# EAGLE board Board (EAGLE 9.7.0)
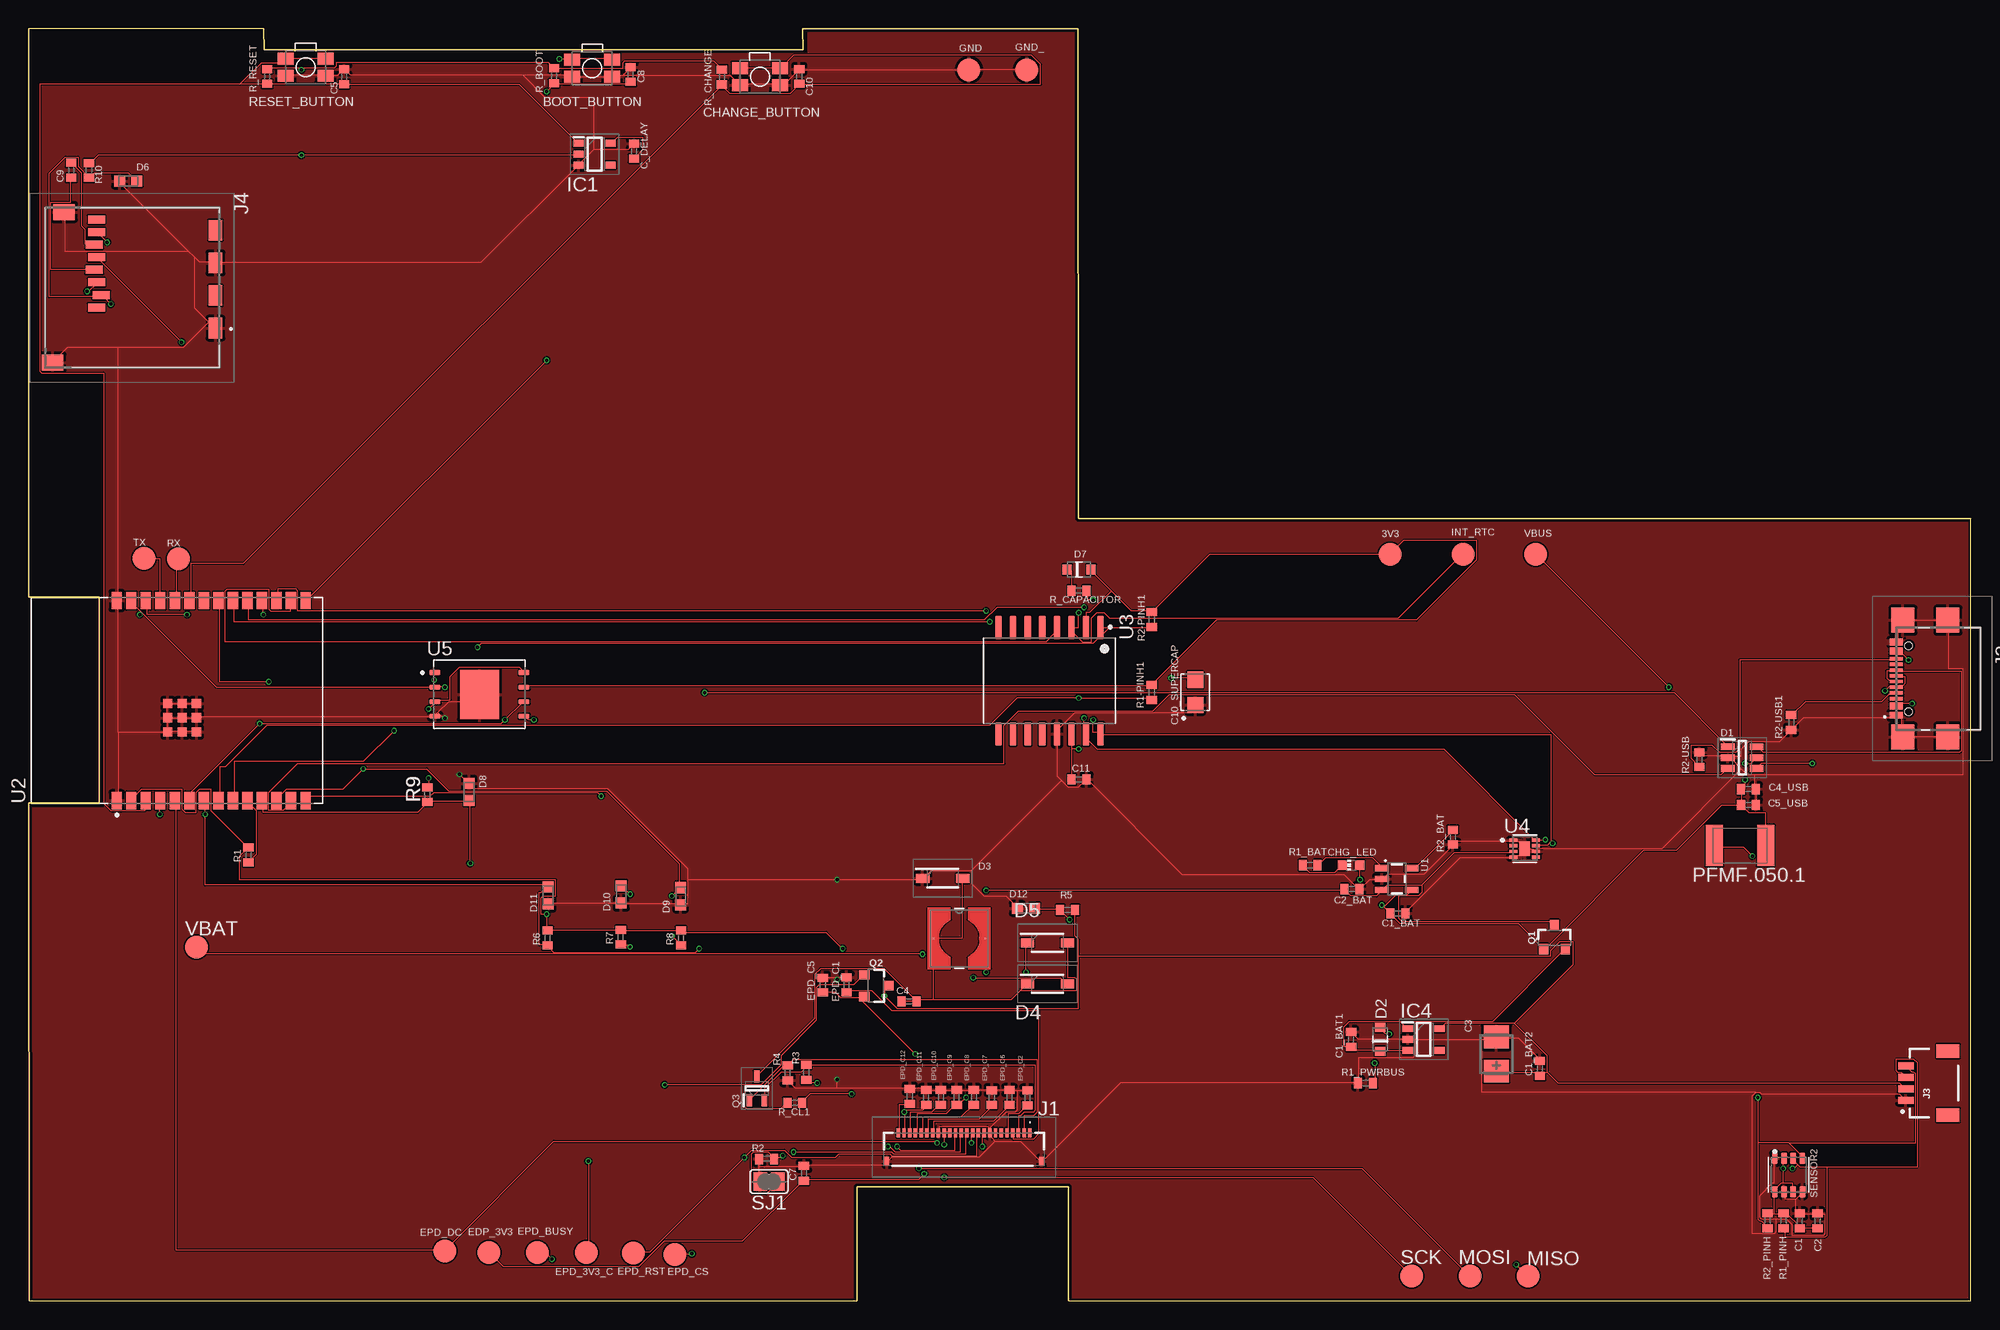
[diagram p0: board, top side]
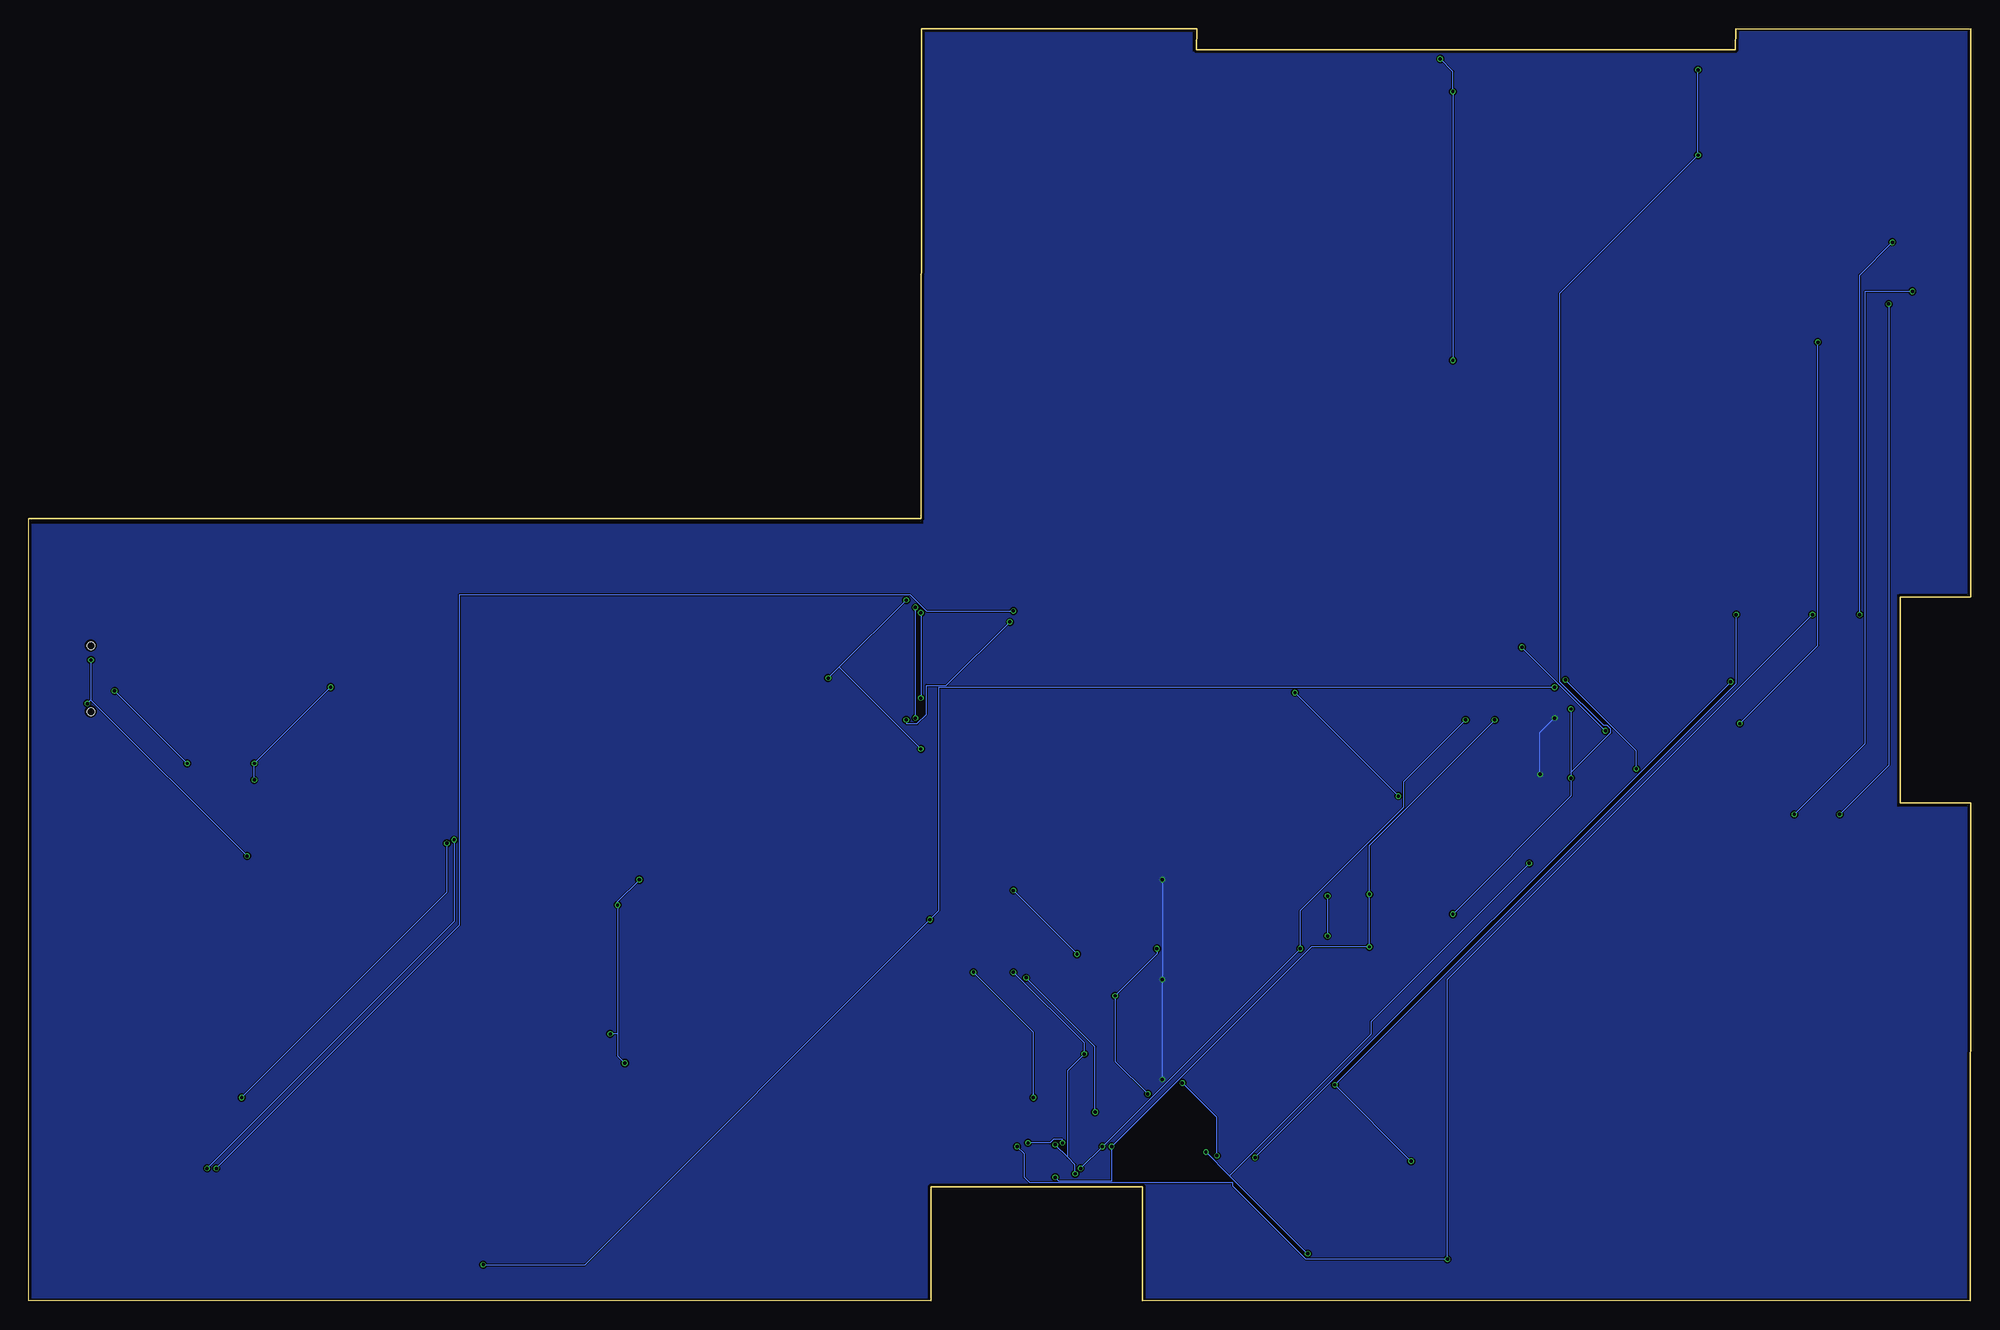
[diagram p1: board, bottom side, seen from below]

Size 169.79 x 111.24 mm. Coordinates in mm from the lower left corner, seen from the top.
Outline: 0.04,0 72.43,0 72.43,9.98 90.89,9.98 90.89,0 169.79,0 169.79,68.42 91.77,68.42 91.74,111.22 67.67,111.22 67.69,109.4 20.58,109.4 20.54,111.24 0,111.24 0,61.54 6.16,61.54 6.16,43.53 0.02,43.53 0.04,0
Copper layers (1*16): Top 0.035mm / dielectric 1.6mm / Bottom 0.035mm
Design rules "jlcpcb-2layers.edru *": minimum track width 0.003809375mm, minimum drill 0.3mm, track to track 5mil, track to pad 5mil, pad to pad 5mil, via to via 5mil, smd to smd 5mil, copper to edge 0.2mm, drill to drill 6mil, minimum pad ring 10mil, minimum via ring 3mil, stop-mask expansion 4mil, vias tented up to drill 0mil, thermal gap 10mil
Net classes: 1 NET: width 0.008 mm

## Footprints (pad centres in the part's own frame; a part is rotated, then mirrored left to right if it is on the bottom)
TP20R = smd 2 x 2: TP 0,0
MYBUTTON = smd 1.4 x 1.05: 1 1.75,0.75; 2 -1.75,0.75; 3 -1.75,-0.75; 4 1.75,-0.75
ESP32_WROVER_EAGLE-LTSPICE_C0402 = smd 0.7 x 0.9: 1 -0.65,0; 2 0.65,0
EAGLE-LTSPICE_C0402 = smd 0.7 x 0.9: 1 -0.65,0; 2 0.65,0
RCL_CT3528 = smd 2 x 2.2: + -1.5,0; - 1.5,0
CAPCP3225X100N = smd 1.4 x 1.4: 1 -1.1,0; 2 1.1,0
ADAFRUIT_CHIP-LED0603 = smd 0.8 x 0.8: A 0,-0.75; C 0,0.75
SOT95P280X145-6N = smd 1.2 x 0.6: 1 -1.25,0.95; 2 -1.25,0; 3 -1.25,-0.95; 4 1.25,-0.95; 5 1.25,0; 6 1.25,0.95
ESP32_WROVER_AVX---SD0805S020S1R0_AVX_SD0805S020S1R0_0 = smd 0.8 x 0.9: 1 -1.05,0; 2 1.05,0
SOD3716X135N = smd 1.15 x 0.8: 1 -1.75,0; 2 1.75,0
DIOC1608X36N = smd 0.97 x 0.94: 1 -0.75,0; 2 0.75,0
SOT95P280X125-5N = smd 0.9 x 0.6: 1 -1.4,0.95; 2 -1.4,0; 3 -1.4,-0.95; 4 1.4,-0.95; 5 1.4,0.95
SOT95P280X120-5N = smd 0.9 x 0.6: 1 -1.4,0.95; 2 -1.4,0; 3 -1.4,-0.95; 4 1.4,-0.95; 5 1.4,0.95
FH34SRJ24S05SH99 = smd 0.3 x 0.8: 1 5.75,1.45; 2 5.25,1.45; 3 4.75,1.45; 4 4.25,1.45; 5 3.75,1.45; 6 3.25,1.45; 7 2.75,1.45; 8 2.25,1.45; 9 1.75,1.45; 10 1.25,1.45; 11 0.75,1.45; 12 0.25,1.45; 13 -0.25,1.45; 14 -0.75,1.45; 15 -1.25,1.45; 16 -1.75,1.45; 17 -2.25,1.45; 18 -2.75,1.45; 19 -3.25,1.45; 20 -3.75,1.45; 21 -4.25,1.45; 22 -4.75,1.45; 23 -5.25,1.45; 24 -5.75,1.45 | smd 0.4 x 0.8: MP1 6.75,-1.05; MP2 -6.75,-1.05
SAMACSYS_PARTS_USB4110GFA = smd 0.3 x 1.15: A1 -3.35,3.678; A4 -2.55,3.678; A5 -1.25,3.678; A6 -0.25,3.678; A7 0.25,3.678; A8 1.25,3.678; A9 2.55,3.678; A12 3.35,3.678; B1 3.05,3.678; B4 2.25,3.678; B5 1.75,3.678; B6 0.75,3.678; B7 -0.75,3.678; B8 -1.75,3.678; B9 -2.25,3.678; B12 -3.05,3.678 | smd 2.18 x 2: MP1 -5.11,-0.827; MP2 5.11,-0.827; MP3 -5.11,3.103; MP4 5.11,3.103 | hole 0.65: -2.89,2.603; 2.89,2.603
JST04_1MM_RA = smd 0.6 x 1.35: 1 -1.5,0; 2 -0.5,0; 3 0.5,0; 4 1.5,0 | smd 1.2 x 2: NC1 2.8,-3.675; NC2 -2.8,-3.675
112ATAARR03ATTEND = smd 1.8 x 1.2: G1 10.6,10.4; G2 4.9,10.4; S1 7.75,10.4; S2 2.05,10.4 | smd 1.4 x 1.9: G3 13.6,-3.85; G4 0.45,-2.85 | smd 0.7 x 1.5: P1 8.8,0; P2 7.7,0.4; P3 6.6,0; P4 5.5,-0.2; P5 4.4,0; P6 3.3,-0.2; P7 2.2,0; P8 1.1,0
IND_4828-WE-TPC_WRE = smd 0.127 x 0.127: 1 -2.286,0; 2 2.286,0
ESP32C6_VARISTOR_CT/CN1812 = smd 1.5 x 3.6: 1 -2.25,0; 2 2.25,0
ESP32_WROVER_SPARKFUN-DISCRETESEMI_SOT23-3 = smd 0.8 x 0.9: 1 -0.95,-1; 2 0.95,-1; 3 0,1.1
SOT65P210X110-3N = smd 1.05 x 0.5: 1 -1.05,0.65; 2 -1.05,-0.65; 3 1.05,0
ESP32_WROVER_EAGLE-LTSPICE_R0402 = smd 0.7 x 0.9: 1 -0.65,0; 2 0.65,0
ESP32_WROVER_BME680_PSON80P300X300X100-8N = smd 1.016 x 0.5: 1 1.458,1.2; 2 1.458,0.4; 3 1.458,-0.4; 4 1.458,-1.2; 5 -1.458,-1.22; 6 -1.458,-0.4; 7 -1.458,0.4; 8 -1.458,1.2
SJ = smd 1.168 x 1.6: 1 -0.762,0; 2 0.762,0
ESP32_WROVER_SPARKFUN-IC-POWER_SOT23-5 = smd 0.55 x 1.2: 1 -0.95,-1.3; 2 0,-1.3; 3 0.95,-1.3; 4 0.95,1.3; 5 -0.95,1.3
XCVR_ESP32-C6-WROOM-1-N8 = smd 1.5 x 0.9: 1 -8.75,5.26; 2 -8.75,3.99; 3 -8.75,2.72; 4 -8.75,1.45; 5 -8.75,0.18; 6 -8.75,-1.09; 7 -8.75,-2.36; 8 -8.75,-3.63; 9 -8.75,-4.9; 10 -8.75,-6.17; 11 -8.75,-7.44; 12 -8.75,-8.71; 13 -8.75,-9.98; 14 -8.75,-11.25; 15 8.75,-11.25; 16 8.75,-9.98; 17 8.75,-8.71; 18 8.75,-7.44; 19 8.75,-6.17; 20 8.75,-4.9; 21 8.75,-3.63; 22 8.75,-2.36; 23 8.75,-1.09; 24 8.75,0.18; 25 8.75,1.45; 26 8.75,2.72; 27 8.75,3.99; 28 8.75,5.26 | smd 0.8 x 0.8: 29_1 -2.755,0.79; 29_2 -1.505,0.79; 29_3 -0.255,0.79; 29_4 -2.755,-0.46; 29_5 -1.505,-0.46; 29_6 -0.255,-0.46; 29_7 -2.755,-1.71; 29_8 -1.505,-1.71; 29_9 -0.255,-1.71
SOIC127P1032X265-16N = smd 2.05 x 0.59: 1 -4.655,4.445; 2 -4.655,3.175; 3 -4.655,1.905; 4 -4.655,0.635; 5 -4.655,-0.635; 6 -4.655,-1.905; 7 -4.655,-3.175; 8 -4.655,-4.445; 9 4.655,-4.445; 10 4.655,-3.175; 11 4.655,-1.905; 12 4.655,-0.635; 13 4.655,0.635; 14 4.655,1.905; 15 4.655,3.175; 16 4.655,4.445
SON50P200X200X80-9N = smd 0.76 x 0.27: 1 -0.985,0.75; 2 -0.985,0.25; 3 -0.985,-0.25; 4 -0.985,-0.75; 5 0.985,-0.75; 6 0.985,-0.25; 7 0.985,0.25; 8 0.985,0.75 | smd 0.9 x 1.3: 9 0,0
SON127P600X800X80-9N = smd 0.94 x 0.44: 1 -3.895,1.905; 2 -3.895,0.635; 3 -3.895,-0.635; 4 -3.895,-1.905; 5 3.895,-1.905; 6 3.895,-0.635; 7 3.895,0.635; 8 3.895,1.905 | smd 3.4 x 4.3: 9 0,0

## Placement (x,y rotation side)
3V3  TPTP20R  [TP20R]  119.04,65.27 0 top
BOOT_BUTTON  BUTTON_CUSYOMV1  [MYBUTTON]  49.27,107.77 180 top
C1  100nF  [ESP32_WROVER_EAGLE-LTSPICE_C0402]  154.84,7.01 90 top
C1_BAT  4.7uF  [EAGLE-LTSPICE_C0402]  119.71,33.88 0 top
C1_BAT1  4.7uF  [EAGLE-LTSPICE_C0402]  115.61,22.86 90 top
C1_BAT2  4.7uF  [EAGLE-LTSPICE_C0402]  132.12,20.32 90 top
C2  100nF  [ESP32_WROVER_EAGLE-LTSPICE_C0402]  156.39,6.99 90 top
C2_BAT  4.7uF  [EAGLE-LTSPICE_C0402]  115.69,36.01 0 top
C3  100uF TANT  [RCL_CT3528]  128.31,21.59 90 top
C4  4.7uF/25V  [EAGLE-LTSPICE_C0402]  76.96,26.2 0 top
C4_USB  100nF  [EAGLE-LTSPICE_C0402]  150.35,44.75 0 top
C5  1uF  [EAGLE-LTSPICE_C0402]  27.59,107.04 90 top
C5_USB  4.7uF  [EAGLE-LTSPICE_C0402]  150.35,43.36 0 top
C7  10uF  [EAGLE-LTSPICE_C0402]  67.78,11.16 90 top
C8  100nF  [EAGLE-LTSPICE_C0402]  52.63,107.22 90 top
C9  [EAGLE-LTSPICE_C0402]  3.73,98.85 90 top
C10  100nF  [EAGLE-LTSPICE_C0402]  67.37,107.06 90 top
C10_SUPERCAP  CPH3225A  [CAPCP3225X100N]  101.99,53.21 90 top
C11  100nF  [EAGLE-LTSPICE_C0402]  91.83,45.59 0 top
C_DELAY  100nF  [EAGLE-LTSPICE_C0402]  52.92,100.52 90 top
CHANGE_BUTTON  BUTTON_CUSYOMV1  [MYBUTTON]  63.94,107.03 180 top
CHG_LED  [ADAFRUIT_CHIP-LED0603]  115.61,38.1 90 top
D1  USBLC6-2SC6Y  [SOT95P280X145-6N]  149.8,47.5 0 top
D2  ESP32_WROVER_AVX---SD0805S020S1R0_AVX_SD0805S020S1R0_0_0AVX_SD0805S020S1R0_0_0  [ESP32_WROVER_AVX---SD0805S020S1R0_AVX_SD0805S020S1R0_0]  118.15,22.86 90 top
D3  MBR0530  [SOD3716X135N]  79.92,36.95 0 top
D4  MBR0530  [SOD3716X135N]  89.06,27.71 0 top
D5  MBR0530  [SOD3716X135N]  89.07,31.31 0 top
D6  PGB1010603MR  [DIOC1608X36N]  8.71,97.9 0 top
D7  ESP32_WROVER_AVX---SD0805S020S1R0_AVX_SD0805S020S1R0_0_0AVX_SD0805S020S1R0_0_0  [ESP32_WROVER_AVX---SD0805S020S1R0_AVX_SD0805S020S1R0_0]  91.83,63.95 0 top
D8  PGB1010603MR  [DIOC1608X36N]  38.51,44.49 270 top
D9  PGB1010603MR  [DIOC1608X36N]  57,35.38 90 top
D10  PGB1010603MR  [DIOC1608X36N]  51.81,35.54 90 top
D11  PGB1010603MR  [DIOC1608X36N]  45.42,35.46 90 top
D12  PGB1010603MR  [DIOC1608X36N]  87.19,34.33 0 top
EDP_3V3  TPTP20R  [TP20R]  40.25,4.23 0 top
EPD_3V3_C  TPTP20R  [TP20R]  48.78,4.23 0 top
EPD_BUSY  TPTP20R  [TP20R]  44.47,4.23 0 top
EPD_C1  1uF/50V  [EAGLE-LTSPICE_C0402]  71.51,27.62 90 top
EPD_C2  1uF/50V  [EAGLE-LTSPICE_C0402]  87.32,17.76 90 top
EPD_C5  0.1uF/50V  [EAGLE-LTSPICE_C0402]  69.42,27.61 90 top
EPD_C6  1uF/50V  [EAGLE-LTSPICE_C0402]  85.75,17.79 90 top
EPD_C7  1uF/50V  [EAGLE-LTSPICE_C0402]  84.2,17.78 90 top
EPD_C8  1uF/50V  [EAGLE-LTSPICE_C0402]  82.63,17.8 90 top
EPD_C9  1uF/50V  [EAGLE-LTSPICE_C0402]  81.13,17.8 90 top
EPD_C10  1uF/50V  [EAGLE-LTSPICE_C0402]  79.75,17.81 90 top
EPD_C11  1uF/50V  [EAGLE-LTSPICE_C0402]  78.46,17.79 90 top
EPD_C12  1uF/50V  [EAGLE-LTSPICE_C0402]  77.03,17.9 90 top
EPD_CS  TPTP20R  [TP20R]  56.51,4.07 0 top
EPD_DC  TPTP20R  [TP20R]  36.38,4.38 0 top
EPD_RST  TPTP20R  [TP20R]  52.85,4.18 0 top
GND  TPTP20R  [TP20R]  82.19,107.64 0 top
GND_  TPTP20R  [TP20R]  87.27,107.64 0 top
IC1  BD5229G-TR  [SOT95P280X125-5N]  49.48,100.26 0 top
IC4  XC6220A331MR-G  [SOT95P280X120-5N]  121.96,22.86 0 top
INT_RTC  TPTP20R  [TP20R]  125.39,65.27 0 top
J1  FH34SRJ-24S-0.5SH_99_  [FH34SRJ24S05SH99]  81.78,13.25 0 top
J2  SAMACSYS_PARTS_USB4110-GF-A  [SAMACSYS_PARTS_USB4110GFA]  166.95,54.41 90 top
J3  QWIIC_RIGHT_ANGLE  [JST04_1MM_RA]  164.1,19.05 90 top
J4  112A-TAAR-R03_ATTEND  [112ATAARR03ATTEND]  5.94,95.65 270 top
L1  68uH  [IND_4828-WE-TPC_WRE]  81.35,31.69 0 top
MISO  TPTP20R  [TP20R]  131.08,2.18 0 top
MOSI  TPTP20R  [TP20R]  126,2.18 0 top
PFMF.050.1  ESP32C6_VARISTORCN1812  [ESP32C6_VARISTOR_CT/CN1812]  149.61,39.82 0 top
Q1  20V/4.2A/52mΩ/1.4W  [ESP32_WROVER_SPARKFUN-DISCRETESEMI_SOT23-3]  133.39,31.75 0 top
Q2  20V/4.2A/52mΩ/1.4W  [ESP32_WROVER_SPARKFUN-DISCRETESEMI_SOT23-3]  74.06,27.56 270 top
Q3  SI1308EDL-T1-GE3  [SOT65P210X110-3N]  63.66,18.58 90 top
R1  10K  [ESP32_WROVER_EAGLE-LTSPICE_R0402]  19.23,38.98 90 top
R1-PINH1  10k  [ESP32_WROVER_EAGLE-LTSPICE_R0402]  98.18,53.21 90 top
R1_BAT  200  [ESP32_WROVER_EAGLE-LTSPICE_R0402]  112.04,38.1 0 top
R1_PINH  [ESP32_WROVER_EAGLE-LTSPICE_R0402]  153.41,7.02 90 top
R1_PWRBUS  100k  [ESP32_WROVER_EAGLE-LTSPICE_R0402]  116.88,19.05 0 top
R2  2.2  [ESP32_WROVER_EAGLE-LTSPICE_R0402]  64.51,12.41 0 top
R2-PINH1  10k  [ESP32_WROVER_EAGLE-LTSPICE_R0402]  98.18,59.56 90 top
R2-USB  5k1  [ESP32_WROVER_EAGLE-LTSPICE_R0402]  146.05,47.32 90 top
R2-USB1  5k1  [ESP32_WROVER_EAGLE-LTSPICE_R0402]  154.08,50.57 90 top
R2_BAT  2k  [ESP32_WROVER_EAGLE-LTSPICE_R0402]  124.51,40.55 90 top
R2_PINH  [ESP32_WROVER_EAGLE-LTSPICE_R0402]  152.02,7.02 90 top
R3  0.47  [ESP32_WROVER_EAGLE-LTSPICE_R0402]  67.99,19.98 90 top
R4  10K  [ESP32_WROVER_EAGLE-LTSPICE_R0402]  66.36,19.95 90 top
R5  10k  [ESP32_WROVER_EAGLE-LTSPICE_R0402]  90.83,34.19 0 top
R6  10k  [ESP32_WROVER_EAGLE-LTSPICE_R0402]  45.38,31.73 90 top
R7  10k  [ESP32_WROVER_EAGLE-LTSPICE_R0402]  51.77,31.81 90 top
R8  10k  [ESP32_WROVER_EAGLE-LTSPICE_R0402]  57.04,31.73 90 top
R9  10k  [ESP32_WROVER_EAGLE-LTSPICE_R0402]  34.86,44.26 90 top
R10  10k  [ESP32_WROVER_EAGLE-LTSPICE_R0402]  5.28,98.84 90 top
R_BOOT  10k  [ESP32_WROVER_EAGLE-LTSPICE_R0402]  45.94,107.11 90 top
R_CAPACITOR  15  [ESP32_WROVER_EAGLE-LTSPICE_R0402]  91.83,62.1 0 top
R_CHANGE  10k  [ESP32_WROVER_EAGLE-LTSPICE_R0402]  60.61,107.01 90 top
R_CL1  10K  [ESP32_WROVER_EAGLE-LTSPICE_R0402]  66.98,17.32 0 top
R_RESET  10k  [ESP32_WROVER_EAGLE-LTSPICE_R0402]  20.86,107.06 90 top
RESET_BUTTON  BUTTON_CUSYOMV1  [MYBUTTON]  24.22,107.85 180 top
RX  TPTP20R  [TP20R]  13.08,64.87 0 top
SCK  TPTP20R  [TP20R]  120.92,2.18 0 top
SENSOR2  BME688  [ESP32_WROVER_BME680_PSON80P300X300X100-8N]  153.86,11.01 90 top
SJ1  [SJ]  64.73,10.44 0 top
TX  TPTP20R  [TP20R]  10.1,64.93 0 top
U1  ESP32_WROVER_SPARKFUN-IC-POWER_MCP73831  [ESP32_WROVER_SPARKFUN-IC-POWER_SOT23-5]  119.61,36.89 270 top
U2  ESP32-C6-WROOM-1-N8  [XCVR_ESP32-C6-WROOM-1-N8]  12.96,52.49 90 top
U3  DS3231SN#  [SOIC127P1032X265-16N]  89.25,54.22 270 top
U4  MAX17048G+T10  [SON50P200X200X80-9N]  130.78,39.54 0 top
U5  W25Q512JVEIQ  [SON127P600X800X80-9N]  39.42,53.03 0 top
VBAT  TPTP20R  [TP20R]  14.67,30.91 0 top
VBUS  TPTP20R  [TP20R]  131.74,65.27 0 top

## Library data of the parts
3V3 BOOT_BUTTON CHANGE_BUTTON CHG_LED EDP_3V3 EPD_3V3_C EPD_BUSY EPD_CS EPD_DC EPD_RST GND GND_ INT_RTC MISO MOSI PFMF.050.1 RESET_BUTTON RX SCK SJ1 TX VBAT VBUS = DeskAssistant v19 v1
C1 C1_BAT C1_BAT1 C1_BAT2 C2 C2_BAT C4 C4_USB C5 C5_USB C7-C11 C_DELAY EPD_C1 EPD_C2 EPD_C5-EPD_C12 = DeskAssistant v19 v1; SPICEMODEL: NONE; SPICEPREFIX: C
C3 = DeskAssistant v19 v1; SPICEPREFIX: C
C10_SUPERCAP = DeskAssistant v19 v1; AVAILABILITY: Not in stock; CHECK_PRICES: https://www.snapeda.com/parts/CPH3225A/Seiko+Instruments/view-part/?ref=eda; DESCRIPTION: 11 mF (EDLC) Supercapacitor 3.3 V 1210 (3225 Metric) - -; MF: Seiko Instruments; MP: CPH3225A; PACKAGE: 1210 Seiko; PRICE: None; PURCHASE-URL: https://www.snapeda.com/api/url_track_click_mouser/?unipart_id=562593&manufacturer=Seiko Instruments&part_name=CPH3225A&search_term=None; SNAPEDA_LINK: https://www.snapeda.com/parts/CPH3225A/Seiko+Instruments/view-part/?ref=snap
D1 = DeskAssistant v19 v1; AVAILABILITY: In Stock; CHECK_PRICES: https://www.snapeda.com/parts/USBLC6-2SC6Y/STMicroelectronics/view-part/?ref=eda; DESCRIPTION: 17V Clamp 5A (8/20µs) Ipp Tvs Diode Surface Mount SOT-23-6; MF: STMicroelectronics; MP: USBLC6-2SC6Y; PACKAGE: SOT-23-6 STMicroelectronics; PRICE: None; SNAPEDA_LINK: https://www.snapeda.com/parts/USBLC6-2SC6Y/STMicroelectronics/view-part/?ref=snap
D2 D7 = DeskAssistant v19 v1; CENTROID_NOT_SPECIFIED: No; DATASHEET: http://datasheets.avx.com/schottky.pdf; DIGIKEY_DESCRIPTION: DIODE SCHOTTKY 20V 1A 0805; DIGIKEY_PART_NUMBER: 478-7800-1-ND; LEAD_FREE: yes; MF: AVX; MOUSER_PART_NUMBER: 581-SD0805S020S1R0; PACKAGE: 0805 (2012 metric); PREFIX: D; ROHS: yes; TEMPERATURE_RANGE_HIGH: +125°C; TEMPERATURE_RANGE_LOW: -55°C
D3-D5 = DeskAssistant v19 v1; AVAILABILITY: In Stock; CHECK_PRICES: https://www.snapeda.com/parts/MBR0530/Onsemi/view-part/?ref=eda; DESCRIPTION: Diode Schottky 30 V 500mA Surface Mount SOD-123; MF: ON Semiconductor; MP: MBR0530; PACKAGE: SOD-123-2 ON Semiconductor; PRICE: None; PURCHASE-URL: https://www.snapeda.com/api/url_track_click_mouser/?unipart_id=179458&manufacturer=ON Semiconductor&part_name=MBR0530&search_term=None; SNAPEDA_LINK: https://www.snapeda.com/parts/MBR0530/Onsemi/view-part/?ref=snap
D6 D8-D12 = DeskAssistant v19 v1; AVAILABILITY: In Stock; CHECK_PRICES: https://www.snapeda.com/parts/PGB1010603MR/Littelfuse/view-part/?ref=eda; DESCRIPTION: 150V (Typ) Clamp - Ipp Tvs Diode Surface Mount 0603 (1608 Metric); MF: Littelfuse Inc.; MP: PGB1010603MR; PACKAGE: 0603 Littelfuse Inc.; PRICE: None; PURCHASE-URL: https://www.snapeda.com/api/url_track_click_mouser/?unipart_id=5659453&manufacturer=Littelfuse Inc.&part_name=PGB1010603MR&search_term=None; SNAPEDA_LINK: https://www.snapeda.com/parts/PGB1010603MR/Littelfuse/view-part/?ref=snap
IC1 = DeskAssistant v19 v1; DESCRIPTION: Voltage Detector with Adjustable Delay Time: CMOS processes are utilized to develop high precision, low current consumption CMOS reset ICs that allow arbitrary setting of the delay time. The extensive lineup includes both Nch Open Drain and CMOS output types in a wide range of detection voltages (from 2.3V to 6.0V, in 0.1V steps), enabling selection of the ideal solution based on customer requirements. In addition, the entire series is of course both lead-free and RoHS-compliant.; HEIGHT: 1.25mm; MANUFACTURER_NAME: ROHM Semiconductor; MANUFACTURER_PART_NUMBER: BD5229G-TR; MOUSER_PART_NUMBER: 755-BD5229G-TR; MOUSER_PRICE-STOCK: https://www.mouser.co.uk/ProductDetail/ROHM-Semiconductor/BD5229G-TR?qs=4kLU8WoGk0vvnhrrYwdszw%3D%3D
IC4 = DeskAssistant v19 v1; DESCRIPTION: LDO Voltage Regulators; HEIGHT: 1.2mm; MANUFACTURER_NAME: Torex; MANUFACTURER_PART_NUMBER: XC6220A331MR-G; MOUSER_PART_NUMBER: 865-XC6220A331MR-G; MOUSER_PRICE-STOCK: https://www.mouser.co.uk/ProductDetail/Torex-Semiconductor/XC6220A331MR-G?qs=AsjdqWjXhJ8ZSWznL1J0gg%3D%3D
J1 = DeskAssistant v19 v1; DESCRIPTION: 24 Position FFC, FPC Connector Contacts, Top and Bottom 0.020" (0.50mm) Surface Mount, Right Angle; HEIGHT: 1.1mm; MANUFACTURER_NAME: Hirose; MANUFACTURER_PART_NUMBER: FH34SRJ-24S-0.5SH(99); MOUSER_PART_NUMBER: 798-FH34SRJ24S05SH99; MOUSER_PRICE-STOCK: https://www.mouser.co.uk/ProductDetail/Hirose-Connector/FH34SRJ-24S-0.5SH99?qs=vcbW%252B4%252BSTIpKBl5ap9J8Fw%3D%3D
J2 = DeskAssistant v19 v1; DESCRIPTION: CONN USB 2.0 TYPE-C R/A SMT; HEIGHT: 3.26mm; MANUFACTURER_NAME: GCT (GLOBAL CONNECTOR TECHNOLOGY); MANUFACTURER_PART_NUMBER: USB4110-GF-A; MOUSER_PART_NUMBER: 640-USB4110-GF-A; MOUSER_PRICE-STOCK: https://www.mouser.co.uk/ProductDetail/GCT/USB4110-GF-A?qs=KUoIvG%2F9IlYiZvIXQjyJeA%3D%3D
J3 = DeskAssistant v19 v1; PROD_ID: CONN-13694
J4 = DeskAssistant v19 v1; DESCRIPTION: Micro SD Card Socket, Push-Push Type, Top Mount, SMT, H=1.83mm, 10u; HEIGHT: 1.9mm; MANUFACTURER_NAME: ATTEND; MANUFACTURER_PART_NUMBER: 112A-TAAR-R03 ATTEND
L1 = DeskAssistant v19 v1; COPYRIGHT: Copyright (C) 2024 Ultra Librarian. All rights reserved.; MANUFACTURER_PART_NUMBER: 744043680; MFR_NAME: Wurth Electronics
Q1 Q2 = DeskAssistant v19 v1; PROD_ID: TRAN-14388
Q3 = DeskAssistant v19 v1; AVAILABILITY: In Stock; CHECK_PRICES: https://www.snapeda.com/parts/SI1308EDL-T1-GE3/Vishay+Siliconix/view-part/?ref=eda; DESCRIPTION: Si1308EDL-T1-GE3 N-channel MOSFET Transistor, 1.5 A, 30 V, 3-Pin SC-70 | Siliconix / Vishay SI1308EDL-T1-GE3; MF: Vishay Siliconix; MP: SI1308EDL-T1-GE3; PACKAGE: SOT-323 Vishay Semiconductor; PRICE: None; PURCHASE-URL: https://www.snapeda.com/api/url_track_click_mouser/?unipart_id=274603&manufacturer=Vishay Siliconix&part_name=SI1308EDL-T1-GE3&search_term=None; SNAPEDA_LINK: https://www.snapeda.com/parts/SI1308EDL-T1-GE3/Vishay+Siliconix/view-part/?ref=snap
R1 R1-PINH1 R1_BAT R1_PINH R1_PWRBUS R2 R2-PINH1 R2-USB R2-USB1 R2_BAT R2_PINH R3-R10 R_BOOT R_CAPACITOR R_CHANGE R_CL1 R_RESET = DeskAssistant v19 v1; SPICEMODEL: NONE; SPICEPREFIX: R
SENSOR2 = DeskAssistant v19 v1; AVAILABILITY: Unavailable; DESCRIPTION: Integrated Environmental Unit; MF: Bosch Sensortec; MP: BME680; PACKAGE: LGA-8 Bosch Tools; PRICE: None
U1 = DeskAssistant v19 v1; PROD_ID: IC-09995
U2 = DeskAssistant v19 v1; AVAILABILITY: In Stock; CHECK_PRICES: https://www.snapeda.com/parts/ESP32-C6-WROOM-1-N8/Espressif+Systems/view-part/?ref=eda; DESCRIPTION: Multiprotocol Modules ESP32-C6 module, Wi-Fi 6 in 2.4 GHz band, Bluetooth 5, Zigbee 3.0 and Thread. ESP34-WROOM Compatible - ENGINEERING SAMPLE; MF: Espressif Systems; MP: ESP32-C6-WROOM-1-N8; PACKAGE: None; PRICE: None; SNAPEDA_LINK: https://www.snapeda.com/parts/ESP32-C6-WROOM-1-N8/Espressif+Systems/view-part/?ref=snap
U3 = DeskAssistant v19 v1; AVAILABILITY: In Stock; CHECK_PRICES: https://www.snapeda.com/parts/DS3231SN%23/Analog+Devices/view-part/?ref=eda; DESCRIPTION: Extremely Accurate I²C-Integrated RTC/TCXO/Crystal; MF: Analog Devices; MP: DS3231SN#; PACKAGE: SOIC-16 Maxim; PRICE: None; PURCHASE-URL: https://www.snapeda.com/api/url_track_click_mouser/?unipart_id=99048&manufacturer=Analog Devices&part_name=DS3231SN#&search_term=None; SNAPEDA_LINK: https://www.snapeda.com/parts/DS3231SN%23/Analog+Devices/view-part/?ref=snap
U4 = DeskAssistant v19 v1; AVAILABILITY: In Stock; CHECK_PRICES: https://www.snapeda.com/parts/MAX17048G+T10/Analog+Devices/view-part/?ref=eda; DESCRIPTION: 3µA 1-Cell/2-Cell Fuel Gauge with ModelGauge; MF: Analog Devices; MP: MAX17048G+T10; PACKAGE: TDFN-8 Maxim; PRICE: None; PURCHASE-URL: https://www.snapeda.com/api/url_track_click_mouser/?unipart_id=329239&manufacturer=Analog Devices&part_name=MAX17048G+T10&search_term=None; SNAPEDA_LINK: https://www.snapeda.com/parts/MAX17048G+T10/Analog+Devices/view-part/?ref=snap
U5 = DeskAssistant v19 v1; AVAILABILITY: In Stock; CHECK_PRICES: https://www.snapeda.com/parts/W25Q512JVEIQ/Winbond+Electronics/view-part/?ref=eda; DESCRIPTION: FLASH - NOR Memory IC 512Mb (64M x 8) SPI - Quad I/O 133 MHz 8-WSON (8x6); MF: Winbond Electronics; MP: W25Q512JVEIQ; PACKAGE: Package; PRICE: None; SNAPEDA_LINK: https://www.snapeda.com/parts/W25Q512JVEIQ/Winbond+Electronics/view-part/?ref=snap

## Nets
3V3 [NET]: 3V3.TP C1_BAT2.1 C3.+ D7.2 IC1.2 IC4.5 J3.2 Q2.3 R1-PINH1.2 R1.2 R2-PINH1.2 R5.2 R6.2 R7.2 R8.2 R9.2 R10.2 R_BOOT.2 R_CHANGE.2 R_CL1.2 R_RESET.2 U2.2 U3.2 U5.3 U5.7 U5.8
32KHZ [NET]: R2-PINH1.1 U2.9 U3.1
DN: D1.4 J2.A7 J2.B7
DP: D1.6 J2.A6 J2.B6
EPD_3V3 [NET]: C7.1 EDP_3V3.TP EPD_C5.1 J1.15 J1.16 L1.2 Q2.2
EPD_3V3_C [NET]: EPD_3V3_C.TP Q2.1 R_CL1.1 U2.18
EPD_BUSY: EPD_BUSY.TP J1.9 U2.26
EPD_CS: D8.2 EPD_CS.TP J1.12 R9.1 U2.11
EPD_DC: EPD_DC.TP J1.11 U2.5
EPD_RST: EPD_RST.TP J1.10 U2.21
FLASH_CS: D9.2 R8.1 U2.12 U5.1
GDR: J1.2 Q3.1 R4.2
GND: BOOT_BUTTON.1 BOOT_BUTTON.2 C1.2 C1_BAT1.2 C1_BAT2.2 C1_BAT.2 C2.2 C2_BAT.2 C3.- C4_USB.2 C5.2 C5_USB.2 C7.2 C8.2 C10.2 C10_SUPERCAP.1 C11.2 C_DELAY.2 CHANGE_BUTTON.1 CHANGE_BUTTON.2 D1.2 D3.1 D6.1 D8.1 D9.1 D10.1 D11.1 D12.1 EPD_C1.2 EPD_C2.2 EPD_C5.2 EPD_C6.2 EPD_C7.2 EPD_C8.2 EPD_C9.2 EPD_C10.2 EPD_C11.2 EPD_C12.2 GND.TP GND_.TP IC1.3 IC4.2 J1.8 J1.17 J1.MP1 J1.MP2 J2.A1 J2.A12 J2.B1 J2.B12 J2.MP1 J2.MP2 J2.MP3 J2.MP4 J3.1 J4.G1 J4.G2 J4.G3 J4.G4 R1_PWRBUS.1 R2-USB1.1 R2-USB.2 R2.1 R2_BAT.1 R4.1 RESET_BUTTON.1 RESET_BUTTON.2 SENSOR2.1 SENSOR2.5 SENSOR2.7 SJ1.1 U1.2 U2.1 U2.28 U2.29_1 U2.29_2 U2.29_3 U2.29_4 U2.29_5 U2.29_6 U2.29_7 U2.29_8 U2.29_9 U3.13 U4.1 U4.4 U4.6 U4.9 U5.4 U5.9
GPIO8: R1.1 U2.10
I2C_PW [NET]: C1.1 C2.1 R1_PINH.2 R2_PINH.2 SENSOR2.2 SENSOR2.6 SENSOR2.8 U2.17
INT_RTC: INT_RTC.TP R1-PINH1.1 U2.8 U3.3
IO/BOOT: BOOT_BUTTON.3 BOOT_BUTTON.4 C8.1 R_BOOT.1 U2.15
IO/CHANGE: C10.1 CHANGE_BUTTON.3 CHANGE_BUTTON.4 R_CHANGE.1 U2.23
MISO: D12.2 J4.P7 MISO.TP R5.1 U2.27 U5.2
MOSI: D11.2 J1.14 J4.P3 MOSI.TP R6.1 U2.7 U5.5
N$1: C9.1 J4.P4
N$2: J2.B5 R2-USB.1
N$3: J2.A5 R2-USB1.2
N$4: C1_BAT1.1 D2.1 IC4.1 IC4.3 Q1.2
N$6: R1_BAT.2 U1.1
N$7: CHG_LED.C R1_BAT.1
N$9: R2_BAT.2 U1.5
N$10: EPD_C1.1 J1.4
N$11: EPD_C2.1 J1.5
N$12: EPD_C6.1 J1.18
N$13: EPD_C7.1 J1.19
N$14: EPD_C8.1 J1.20
N$15: EPD_C10.1 J1.22
N$16: EPD_C12.1 J1.24
N$17: C_DELAY.1 IC1.5
N$18: D7.1 R_CAPACITOR.1
N$19: C9.2 J4.P6
PREVGH: D5.1 EPD_C9.1 J1.21
PREVGL: D4.2 EPD_C11.1 J1.23
RESE: J1.3 Q3.2 R3.2
RESE': R2.2 R3.1 SJ1.2
RESET: C5.1 IC1.1 R_RESET.1 RESET_BUTTON.3 RESET_BUTTON.4 U2.3
RTC_RST: U2.16 U3.4
RX: RX.TP U2.24
SCK: D10.2 J1.13 J4.P5 R7.1 SCK.TP U2.6 U5.6
SCL: J3.4 R2_PINH.1 SENSOR2.4 U2.20 U3.16 U4.7
SDA: J3.3 R1_PINH.1 SENSOR2.3 U2.19 U3.15 U4.8
SRC: C4.1 C4.2 D3.2 D4.1 D5.2 L1.1 Q3.3
SS_SD: D6.2 J4.P2 R10.1 U2.4
TX: TX.TP U2.25
USB_D+: D1.1 U2.14
USB_D-: D1.3 U2.13
VBAT [NET]: C2_BAT.1 Q1.3 U1.3 U4.2 U4.3 VBAT.TP
VBUS [NET]: C1_BAT.1 C4_USB.1 C5_USB.1 CHG_LED.A D1.5 D2.2 PFMF.050.1.2 Q1.1 R1_PWRBUS.2 U1.4 VBUS.TP
VRTC [NET]: C10_SUPERCAP.2 C11.1 R_CAPACITOR.2 U3.14
VUSB [NET]: J2.A4 J2.A9 J2.B4 J2.B9 PFMF.050.1.1

## Tracks (layer width: path | path; a pad name or v marks a point on that pad's centre or on a via)
3V3  (via drill 0.3)
  Top 0.008: 23.85,107.79 26.71,107.79 26.87,107.95 26.87,108.27 45.44,108.27 45.92,107.79 R_BOOT.2 46.08,107.79 51.95,107.79 51.95,108.27 52.11,108.43 59.89,108.43 60.52,107.79 R_CHANGE.2 | 23.85,107.79 20.99,107.79 R_RESET.2 | R10.2 5.44,99.54 6.07,100.17 v23.85,100.17 47.98,100.17 IC1.2 | v23.85,107.63 23.85,107.79 | 131.8,20 132.12,19.68 C1_BAT2.1 131.8,20 | 131.8,20 128.31,20 C3.+ | 129.9,24.29 123.86,24.29 123.39,23.81 IC4.5 | 129.9,24.29 132.75,21.43 132.75,20 | 131.8,20 132.75,20 | 132.75,20 133.71,19.05 163.55,19.05 164.03,18.57 J3.2 | 94.65,62.07 96.4,60.33 98.15,60.33 R2-PINH1.2 98.3,60.33 103.23,65.25 118.94,65.25 3V3.TP 119.1,65.41 120.21,66.52 126.56,66.52 126.56,64.77 121.32,59.53 103.86,59.53 98.3,53.98 R1-PINH1.2 98.15,53.82 43.38,53.82 | 94.65,62.07 92.91,63.82 D7.2 | 94.65,62.07 92.75,60.17 92.43,60.17 92.43,58.9 U3.2 | v71.95,18.1 68.3,18.1 67.67,17.46 R_CL1.2 | Q2.3 75.13,27.46 74.81,27.46 v74.81,26.67 75.92,25.56 91.8,25.56 91.8,30.16 | 91.8,30.16 91.8,31.59 91.48,31.91 91.48,34.13 R5.2 | U2.2 8.93,43.81 9.88,44.77 13.37,44.77 13.37,43.02 13.69,42.7 14.64,42.7 14.64,44.45 14.96,44.77 15.91,44.77 15.91,42.86 19.09,39.69 R1.2 19.09,39.53 18.45,38.89 18.45,36.83 46.08,36.83 46.08,35.4 44.96,35.4 44.81,35.24 44.81,33.81 v45.28,33.81 45.28,32.38 R6.2 45.44,32.38 51.63,32.38 R7.2 51.79,32.38 57.03,32.38 R8.2 57.19,32.23 69.73,32.23 v71.16,30.8 | 43.38,53.82 43.38,54.93 U5.8 43.22,55.09 42.9,55.4 37.66,55.4 36.87,54.61 36.87,52.55 35.6,52.55 U5.3 35.6,52.39 v34.96,51.75 | v34.96,45.72 34.96,44.93 R9.2 | 43.38,53.82 U5.7 | 129.9,24.29 134.98,29.37 134.98,31.43 133.86,31.43 133.07,30.64 133.07,30.16 91.8,30.16
  Bottom 0.008: v23.85,107.63 v23.85,100.17 35.92,88.11 35.92,54.13 32.11,50.32 31.79,50.32 31.47,50.01 31.47,49.69 34.96,46.2 | v71.95,18.1 74.81,20.95 v74.81,26.67 71.16,30.32 v71.16,30.8 | v34.96,51.75 34.96,46.2 | 34.96,46.2 v34.96,45.72 34.96,44.13 v45.28,33.81
32KHZ  (via drill 0.3)
  Top 0.008: 94.49,58.9 93.7,58.9 U3.1 | 94.49,58.9 98.15,58.9 R2-PINH1.1 | v31.95,49.85 29.25,47.15 17.98,47.15 17.98,43.81 U2.9 | v39.25,57.15 39.57,57.47 93.07,57.47 94.49,58.9
  Bottom 0.008: v39.25,57.15 v31.95,49.85
DN  (via drill 0.3)
  Top 0.004: J2.A7 163.39,54.61 164.03,54.61 164.03,53.98 163.87,53.82 163.55,53.82 163.39,53.66 J2.B7 163.23,53.66 162.6,53.66 v162.28,53.34 | v155.93,46.99 151.49,46.99 151.17,46.67 D1.4
  Bottom 0.004: v162.28,53.34 v155.93,46.99
DP
  Top 0.004: J2.A6 163.23,54.29 162.6,54.29 162.44,54.45 162.44,55.09 163.23,55.09 J2.B6 163.39,55.09 168.95,55.09 168.95,48.1 168.79,47.94 151.64,47.94 151.17,48.42 D1.6
EPD_3V3  (via drill 0.3)
  Top 0.008: 72.75,26.35 72.9,26.51 Q2.2 72.75,26.35 | J1.15 80.52,14.76 80.05,14.76 J1.16 80.05,14.61 v80.05,13.65 | EDP_3V3.TP 40.36,4.13 41.47,3.02 53.38,3.02 55.6,5.24 62.43,5.24 67.67,10.48 C7.1 67.82,10.64 77.83,10.64 v78.3,11.11 | v77.51,21.59 72.75,26.35 | v83.7,28.73 83.7,31.75 L1.2 | 72.75,26.35 72.61,26.49 71.01,26.49 70.53,26.96 EPD_C5.1
  Bottom 0.008: 78.94,12.54 78.3,11.91 v78.3,11.11 | 78.94,12.54 v80.05,13.65 | 78.94,12.54 78.94,20.16 v77.51,21.59 77.51,22.54 v83.7,28.73
EPD_3V3_C  (via drill 0.3)
  Top 0.008: 62.59,18.89 62.59,16.99 62.74,16.83 65.76,16.83 66.24,17.3 R_CL1.1 | 62.59,18.89 64.01,18.89 65.76,20.64 65.76,21.43 68.84,24.51 68.84,27.37 69.1,27.62 72.11,27.62 72.9,28.42 Q2.1 | v20.52,60.01 20.52,61.12 U2.18 | 62.59,18.89 v55.6,18.89 | v48.93,12.22 48.93,4.29 EPD_3V3_C.TP
  Bottom 0.008: v20.52,60.01 20.52,53.98 v55.6,18.89 v48.93,12.22
EPD_BUSY  (via drill 0.3)
  Top 0.004: v83.38,13.49 83.38,14.61 J1.9 | v45.76,3.65 45.28,4.13 44.49,4.13 EPD_BUSY.TP | v13.85,60.01 10.36,60.01 10.36,61.12 U2.26
  Bottom 0.004: v83.38,13.49 82.75,12.86 82.75,10.79 82.27,10.32 64.49,10.32 64.49,10 58.14,3.65 v45.76,3.65 45.76,28.1 v13.85,60.01
EPD_CS  (via drill 0.3)
  Top 0.004: U2.11 20.52,43.66 20.52,42.7 34.01,42.7 34.8,43.5 R9.1 34.96,43.66 38.46,43.66 D8.2 38.61,43.66 v38.61,38.26 | v66.87,13.02 75.44,13.02 75.6,12.86 81.95,12.86 81.95,14.61 J1.12 | v57.98,4.13 56.55,4.13 EPD_CS.TP
  Bottom 0.004: v57.98,4.13 64.81,10.95 | 64.81,10.95 v66.87,13.02 | v38.61,38.26 52.43,24.45 52.43,23.34 64.81,10.95
EPD_DC  (via drill 0.3)
  Top 0.004: v82.43,13.81 82.43,14.61 J1.11 | v79.41,13.81 79.25,13.97 45.92,13.97 36.39,4.45 EPD_DC.TP 36.23,4.45 12.9,4.45 12.9,43.66 U2.5
  Bottom 0.004: v82.43,13.81 80.52,13.81 80.21,14.13 79.41,14.13 v79.41,13.81
EPD_RST  (via drill 0.3)
  Top 0.004: J1.10 82.91,14.61 82.91,12.7 75.44,12.7 75.29,12.86 70.84,12.86 70.52,12.54 66.71,12.54 66.08,13.18 63.22,13.18 v62.59,12.54 54.33,4.29 52.9,4.29 EPD_RST.TP | v20.99,54.13 16.71,54.13 16.71,61.12 U2.21
  Bottom 0.004: v62.59,12.54 v20.99,54.13
FLASH_CS  (via drill 0.3)
  Top 0.004: v56.24,31.91 57.03,31.11 R8.1 | v56.24,35.4 56.87,36.04 D9.2 56.87,36.2 56.87,38.26 50.52,44.61 36.71,44.61 34.8,46.51 v29.25,46.51 27.5,44.77 22.58,44.77 21.63,43.81 U2.12 | v35.44,54.29 35.44,54.93 U5.1
  Bottom 0.004: v56.24,35.4 v56.24,31.91 | v35.44,54.29 29.25,48.1 v29.25,46.51
GDR
  Top 0.004: J1.2 87.03,14.76 87.03,16.19 87.83,16.19 88.14,16.51 88.14,21.11 66.87,21.11 66.4,20.64 R4.2 66.24,20.48 65.92,20.48 63.06,17.62 Q3.1
GND  (via drill 0.3)
  Top 0.004: GND_.TP 87.19,107.63 82.27,107.63 GND.TP 82.11,107.63 67.51,107.63 C10.2 67.35,107.63 66.08,106.36 65.76,106.36 CHANGE_BUTTON.2 65.6,106.36 62.27,106.36 CHANGE_BUTTON.1 62.11,106.36 61.32,107.16 51.95,107.16 | 49.41,100.65 48.14,99.38 IC1.3 47.98,99.22 39.57,90.81 16.39,90.81 J4.G2 16.23,90.81 14.96,90.81 14.48,91.28 | 49.41,100.65 52.43,100.65 52.9,101.12 C_DELAY.2 | RESET_BUTTON.1 22.58,107.16 25.91,107.16 RESET_BUTTON.2 26.07,107.16 27.03,107.16 27.5,107.63 C5.2 27.66,107.63 28.14,107.16 43.22,107.16 | 51.95,107.16 52.58,107.79 C8.2 | 51.95,107.16 51.16,107.16 BOOT_BUTTON.2 51,107 47.66,107 BOOT_BUTTON.1 47.5,107.16 43.22,107.16 | 49.41,100.65 49.41,105.25 45.12,105.25 43.22,107.16 | 14.48,91.28 14.01,91.76 | 14.01,91.76 7.98,97.79 D6.1 | 15.75,85.57 14.48,86.84 14.48,91.28 | 15.75,85.57 16.23,85.09 J4.G1 15.75,85.57 | 7.82,83.34 13.53,83.34 15.75,85.57 | 7.82,83.34 3.37,83.34 2.1,82.07 J4.G3 | 14.01,91.76 3.21,91.76 3.21,95.09 J4.G4 | 35.76,51.44 36.71,52.39 38.77,52.39 U5.9 | 35.76,51.44 35.6,51.28 U5.4 35.44,51.12 14.8,51.12 U2.29_8 14.64,50.96 13.53,50.96 U2.29_5 13.37,50.96 12.26,50.96 U2.29_2 | U2.29_1 12.1,49.85 12.1,50.96 U2.29_2 | U2.29_1 12.26,49.85 13.37,49.85 U2.29_4 13.53,49.85 14.64,49.85 U2.29_7 | U2.29_2 12.1,51.12 12.1,52.23 U2.29_3 12.26,52.23 13.37,52.23 U2.29_6 13.53,52.23 14.64,52.23 U2.29_9 | 7.82,49.69 7.82,43.81 U2.1 | 7.82,49.69 12.1,49.69 U2.29_1 | 7.82,49.69 7.82,61.12 U2.28 7.82,61.28 7.82,83.34 | 63.86,11.75 63.86,10.48 SJ1.1 | 63.86,11.75 63.86,12.38 R2.1 | 63.86,11.75 67.67,11.75 C7.2 67.82,11.91 74.81,11.91 74.97,12.06 J1.MP2 75.13,12.22 75.44,12.54 83.06,12.54 84.49,13.97
  Top 0.004: 84.02,15.08 83.86,15.24 79.57,15.24 79.57,14.76 J1.17 | 84.02,15.08 84.02,14.76 J1.8 | 84.49,13.97 86.72,13.97 88.46,12.22 J1.MP1 88.62,12.22 95.45,19.05 R1_PWRBUS.1 116.24,19.05 116.24,21.27 121.01,21.27 121.16,21.43 121.16,22.86 | 84.49,13.97 84.18,14.29 84.18,14.61 J1.8 | 86.4,18.41 85.76,18.41 EPD_C6.2 85.6,18.41 84.33,18.41 EPD_C7.2 84.18,18.41 82.75,18.41 EPD_C8.2 82.59,18.41 81.16,18.41 EPD_C9.2 81,18.41 79.89,18.41 EPD_C10.2 79.73,18.41 78.62,18.41 EPD_C11.2 78.46,18.57 77.19,18.57 EPD_C12.2 77.03,18.57 70.68,18.57 | 86.4,18.41 87.19,18.41 EPD_C2.2 | 70.68,28.26 71.48,28.26 EPD_C1.2 | 70.68,28.26 69.54,28.26 EPD_C5.2 | 70.68,18.57 67.03,18.57 66.4,19.21 R4.1 | v70.68,28.1 70.68,28.26 | 70.68,18.57 v70.68,19.37 | 84.02,15.08 85.45,16.51 86.24,16.51 86.4,16.67 86.4,18.41 | 84.02,15.08 J1.8 | 128.31,23.02 130.21,23.02 132.12,21.11 C1_BAT2.2 | C1_BAT1.2 115.61,23.5 116.24,22.86 IC4.2 121.16,22.86 | 128.31,23.02 128.15,22.86 127.04,22.86 | 121.16,22.86 127.04,22.86 | 128.31,23.02 C3.- | 154.5,8.89 153.55,8.89 153.55,9.53 SENSOR2.7 | 154.5,8.89 155.14,9.53 SENSOR2.5 | 152.76,7.14 153.71,7.14 154.18,6.67 154.18,5.71 156.88,5.71 157.04,5.87 157.04,7.62 156.41,7.62 C2.2 156.25,7.62 154.98,7.62 C1.2 154.82,7.78 154.5,7.78 154.5,8.89 | 152.76,7.14 151.49,7.14 151.33,7.3 151.33,9.21 152.44,10.32 152.6,10.32 152.6,12.38 SENSOR2.1 | 151.01,18.26 151.33,18.26 151.49,18.1 163.55,18.1 164.03,17.62 J3.1 | 151.01,18.26 150.69,17.94 150.69,5.87 152.6,5.87 152.76,6.03 152.76,7.14 | 127.04,22.86 127.04,18.26 151.01,18.26 | 130.85,39.53 130.21,38.89 129.9,38.89 U4.4 129.74,38.73 125.13,38.73 120.37,33.97 C1_BAT.2
  Top 0.004: 130.85,39.53 131.48,39.53 131.64,39.37 U4.6 131.8,39.37 131.96,39.53 142.75,39.53 149.74,46.51 | 130.85,39.53 U4.9 130.69,39.69 130.21,40.16 129.9,40.16 U4.1 129.74,40.16 124.82,40.16 124.66,40.01 R2_BAT.1 124.5,39.85 121.96,37.31 118.78,37.31 118.47,36.99 U1.2 118.31,36.83 117.2,36.83 116.4,36.04 C2_BAT.2 116.24,36.04 114.97,37.31 100.84,37.31 92.59,45.56 C11.2 92.43,45.56 91.8,44.93 90.84,44.93 90.37,45.4 | J2.A1 163.23,50.96 155.14,50.96 154.18,50.01 R2-USB1.1 154.03,49.85 153.07,48.9 150.37,48.9 149.74,48.26 149.74,47.62 148.63,47.62 D1.2 | J2.B12 163.23,51.28 163.23,51.12 J2.A1 | J2.A1 163.39,50.96 163.71,50.96 163.71,49.37 J2.MP3 163.87,49.37 167.68,49.37 J2.MP1 | J2.B1 163.23,57.47 163.23,57.63 J2.A12 163.39,57.78 163.39,59.37 163.71,59.37 J2.MP4 163.87,59.53 167.68,59.53 J2.MP2 167.84,59.37 167.84,55.24 169.11,55.24 169.11,46.04 150.85,46.04 | C5_USB.2 151.01,43.5 151.01,44.61 C4_USB.2 150.85,44.77 150.85,46.04 | R2-USB.2 146.09,47.94 146.41,47.62 148.47,47.62 D1.2 | 150.85,46.04 150.22,46.04 149.74,46.51 | 149.74,46.51 148.79,47.47 148.63,47.47 D1.2 | D11.1 45.44,34.77 51.79,34.77 D10.1 51.95,34.77 56.87,34.77 D9.1 57.03,34.77 57.66,34.77 57.66,36.83 | 57.66,36.83 57.66,37.78 50.68,44.77 38.93,44.77 38.61,45.09 D8.1 38.46,45.24 v37.66,46.04 | 82.43,37.62 82.43,36.51 83.54,35.4 85.45,35.4 86.4,34.45 D12.1 | 82.43,37.62 78.94,37.62 78.3,36.99 D3.1 78.14,36.83 v70.68,36.83 57.66,36.83 | 90.37,45.4 89.89,45.88 89.89,49.53 U3.13 89.73,49.69 91.48,51.44 101.32,51.44 101.96,52.07 C10_SUPERCAP.1 | 82.43,37.62 90.21,45.4 90.37,45.4
  Top 0.004: 35.76,51.44 36.23,50.96 v36.39,50.96
  Bottom 0.004: v70.68,19.37 v70.68,28.1 v70.68,36.83 | v36.39,50.96 37.66,49.69 v37.66,46.04
  pour Top: 6.6,61.68 6.6,43.12 6.6,43.12 0.2,43.12 0.2,0.15 72.4,0.15 72.4,10.02 72.41,10.02 91.08,10.02 91.09,10.02 91.09,0.27 169.64,0.27 169.64,68.26 91.63,68.26 91.62,68.26 91.62,111.02 68.1,111.02 68.1,109.05 68.09,109.05 20.39,109.05 20.38,109.05 20.38,111.05 0.13,111.05 0.13,61.73 6.44,61.73 6.44,61.72 6.44,61.69 6.6,61.69
  pour Bottom: 6.5,61.8 6.5,43.19 6.5,43.19 0.29,43.19 0.29,0.07 72.18,0.07 72.18,10.08 72.18,10.08 91.06,10.08 91.06,10.08 91.06,0.16 169.48,0.16 169.48,67.92 91.54,67.92 91.53,67.93 91.53,111.14 68.09,111.14 68.09,109.2 68.09,109.2 20.43,109.2 20.42,109.2 20.42,111.1 0.16,111.1 0.2,111.02 0.2,111.02 0.2,111.02 0.2,111.01 0.2,111.01 0.2,111.01 0.2,111.01 0.2,111.01 0.2,111.01 0.2,111.01 0.19,111.01 0.19,111.01 0.19,111.01 0.16,111.01 0.16,61.81 6.5,61.81
GPIO8
  Top 0.004: R1.1 19.25,38.42 19.88,39.05 19.88,42.86 19.09,43.66 U2.10
I2C_PW  (via drill 0.3)
  Top 0.008: C2.1 156.25,6.35 154.98,6.35 C1.1 154.82,6.51 153.71,7.62 153.55,7.62 R1_PINH.2 153.39,7.62 152.6,7.62 | 152.6,7.62 152.12,7.62 R2_PINH.2 | 152.6,7.62 152.6,9.53 SENSOR2.8 152.6,9.68 153.23,10.32 153.39,10.32 | 153.39,10.32 v153.39,11.59 153.39,12.38 SENSOR2.2 | 153.39,10.32 154.18,10.32 154.18,9.68 SENSOR2.6 | v83.7,60.33 23.53,60.33 23.53,62.07 23.37,62.23 21.79,62.23 21.79,61.28 U2.17
  Bottom 0.008: v83.7,60.33 91.32,60.33 92.75,61.75 132.12,61.75 132.12,32.86 v153.39,11.59
INT_RTC  (via drill 0.3)
  Top 0.004: v91.8,60.17 91.8,58.9 91.16,58.9 U3.3 91,58.74 92.11,57.63 92.91,57.63 92.91,59.69 93.38,60.17 94.02,60.17 94.49,59.69 119.74,59.69 125.29,65.25 INT_RTC.TP | R1-PINH1.1 98.15,52.7 v91.8,52.7 86.4,52.7 84.02,50.32 20.83,50.32 17.18,46.67 16.71,46.67 16.71,43.81 U2.8
  Bottom 0.004: v91.8,60.17 v91.8,52.7
IO/BOOT  (via drill 0.3)
  Top 0.004: BOOT_BUTTON.3 51,108.58 47.66,108.58 BOOT_BUTTON.4 47.5,108.58 v46.39,108.58 | C8.1 52.58,106.52 52.43,106.36 46.08,106.36 R_BOOT.1 45.92,106.36 v45.28,105.73 | v45.28,82.23 24.33,61.28 U2.15
  Bottom 0.004: v45.28,82.23 v45.28,105.73 45.28,107.47 v46.39,108.58
IO/CHANGE
  Top 0.004: CHANGE_BUTTON.4 62.27,107.79 65.6,107.79 CHANGE_BUTTON.3 65.76,107.79 66.87,108.9 87.67,108.9 88.46,108.11 88.46,106.36 67.51,106.36 C10.1 67.35,106.36 66.55,105.57 61.32,105.57 60.68,106.2 R_CHANGE.1 60.52,106.2 18.77,64.45 14.17,64.45 14.17,61.28 U2.23
MISO  (via drill 0.3)
  Top 0.004: 9.88,60.17 8.93,61.12 U2.27 | 9.88,60.17 16.39,53.66 35.44,53.66 U5.2 35.6,53.66 v36.39,53.66 | v6.86,92.55 6.07,93.34 J4.P7 | 9.88,60.17 v9.72,60.01 | D12.2 87.99,34.29 90.05,34.29 R5.1 90.21,34.13 v91,33.34 | v130.05,3.17 131.01,2.22 MISO.TP
  Bottom 0.004: v6.86,92.55 9.72,89.69 v9.72,60.01 | v130.05,3.17 121.16,3.17 v91,33.34 90.21,34.13 90.21,53.66 v36.39,53.66
MOSI  (via drill 0.3)
  Top 0.004: v75.92,13.49 76.24,13.18 81,13.18 81,14.61 J1.14 | v58.62,30.8 58.3,30.48 45.92,30.48 45.44,30.96 R6.1 45.28,31.11 44.65,31.11 44.65,35.72 44.81,35.72 45.28,36.2 D11.2 45.28,36.35 15.44,36.35 v15.44,42.55 15.44,43.66 U2.7 | v44.17,50.8 43.69,50.8 43.38,51.12 U5.5 | v5.12,88.27 5.28,88.27 5.91,88.9 J4.P3 | v77.83,11.59 116.56,11.59 125.93,2.22 MOSI.TP
  Bottom 0.004: v44.17,50.8 49.57,45.4 49.57,43.18 58.62,34.13 v58.62,30.8 v75.92,13.49 v77.83,11.59 | v5.12,88.27 9.25,88.27 9.25,48.74 v15.44,42.55
N$1
  Top 0.004: C9.1 3.69,98.11 3.69,96.04 1.94,96.04 1.94,90.17 5.59,90.17 J4.P4
N$2
  Top 0.004: R2-USB.1 145.93,46.83 145.29,47.47 145.29,48.58 147.2,48.58 147.83,47.94 149.26,47.94 149.58,48.26 149.58,56.04 163.23,56.04 J2.B5
N$3
  Top 0.004: R2-USB1.2 154.18,51.28 155.3,52.39 161.96,52.39 162.6,53.02 163.23,53.02 J2.A5
N$4
  Top 0.004: 118.15,21.91 115.77,21.91 115.61,22.07 C1_BAT1.1 115.61,22.23 114.97,22.23 114.97,23.97 115.45,24.45 119.89,24.45 | 118.15,21.91 120.53,21.91 IC4.3 | 118.15,21.91 D2.1 | 119.89,24.45 120.53,23.81 IC4.1 | 119.89,24.45 127.99,24.45 134.18,30.64 Q1.2
N$6
  Top 0.004: R1_BAT.2 112.75,38.1 113.39,38.73 117.51,38.73 118.31,37.94 U1.1
N$7
  Top 0.004: CHG_LED.C 114.81,38.1 114.18,37.47 111.96,37.47 111.48,37.94 R1_BAT.1
N$9
  Top 0.004: R2_BAT.2 124.5,41.12 121.32,37.94 121.01,37.94 U1.5
N$10
  Top 0.004: J1.4 86.08,14.61 86.08,14.13 87.83,14.13 88.3,14.61 88.3,25.4 75.44,25.4 73.7,27.15 71.79,27.15 71.63,26.99 EPD_C1.1
N$11
  Top 0.004: J1.5 85.6,14.76 85.6,16.35 86.56,16.35 87.19,16.99 EPD_C2.1
N$12
  Top 0.004: J1.18 79.1,14.76 79.1,15.72 84.33,15.72 85.6,16.99 EPD_C6.1
N$13
  Top 0.004: J1.19 78.62,14.76 78.62,15.88 83.06,15.88 84.18,16.99 EPD_C7.1
N$14
  Top 0.004: J1.20 78.14,14.76 78.14,16.03 81.48,16.03 82.59,17.14 EPD_C8.1
N$15
  Top 0.004: J1.22 77.03,14.76 77.03,16.51 78.94,16.51 79.57,17.14 79.73,17.14 EPD_C10.1
N$16
  Top 0.004: J1.24 76.08,14.76 76.08,17.14 77.03,17.14 EPD_C12.1
N$17
  Top 0.004: C_DELAY.1 53.06,100.01 53.7,100.65 53.7,101.76 51.47,101.76 51,101.28 IC1.5
N$18
  Top 0.004: R_CAPACITOR.1 91.16,62.23 91.16,63.82 90.84,63.82 D7.1
N$19
  Top 0.004: C9.2 3.85,99.38 4.64,98.58 4.64,93.98 4.96,93.66 4.96,92.39 5.59,92.39 J4.P6
PREVGH  (via drill 0.3)
  Top 0.004: J1.21 77.67,14.76 77.67,16.35 80.21,16.35 81,17.14 EPD_C9.1 81.16,17.3 81.48,17.3 v81.95,17.78 | v87.19,28.73 87.19,31.27 D5.1
  Bottom 0.004: v87.19,28.73 81.95,23.5 v81.95,17.78
PREVGL  (via drill 0.3)
  Top 0.004: J1.23 76.56,14.76 v76.56,16.51 76.56,16.67 78.14,16.67 78.46,16.99 EPD_C11.1 | v82.59,28.26 90.21,28.26 90.68,27.78 D4.2
  Bottom 0.004: v82.59,28.26 76.56,22.23 v76.56,16.51
RESE
  Top 0.004: J1.3 86.56,14.76 86.56,16.19 86.72,16.19 87.03,16.51 87.83,16.51 87.99,16.67 87.99,20.64 68.14,20.64 R3.2 67.98,20.48 67.51,20 65.76,20 64.33,18.57 64.33,17.62 Q3.2
RESE'  (via drill 0.3)
  Top 0.004: SJ1.2 65.44,10.32 64.49,9.37 63.22,9.37 63.22,12.86 63.38,13.02 64.65,13.02 65.13,12.54 R2.2 65.28,12.54 65.76,12.54 v65.92,12.7 | v68.94,19.05 68.3,19.05 68.14,19.21 R3.1
  Bottom 0.004: v68.94,19.05 65.92,16.03 v65.92,12.7
RESET
  Top 0.004: RESET_BUTTON.3 25.91,108.58 22.58,108.58 RESET_BUTTON.4 22.42,108.58 22.1,108.27 20.36,108.27 18.45,106.36 | IC1.1 47.98,101.28 42.9,106.36 27.66,106.36 C5.1 27.5,106.36 20.99,106.36 R_RESET.1 20.83,106.36 18.45,106.36 | 18.45,106.36 0.99,106.36 0.99,81.28 1.15,81.12 6.55,81.12 6.55,43.5 7.18,42.86 10.2,42.86 10.2,43.66 U2.3
RTC_RST
  Top 0.004: U2.16 22.9,61.12 22.9,60.33 21.15,60.33 20.99,60.48 20.99,62.23 17.34,62.23 17.18,62.07 17.18,57.63 88.94,57.63 89.73,58.42 89.73,58.74 U3.4
RX
  Top 0.004: U2.24 12.9,61.28 12.9,64.77 13.06,64.77 RX.TP
SCK  (via drill 0.3)
  Top 0.004: U5.6 43.22,52.39 v41.63,50.8 41.31,50.48 v20.2,50.48 14.17,44.45 14.17,43.81 U2.6 | v13.37,83.82 6.07,91.12 J4.P5 | v75.13,13.49 75.29,13.49 75.76,13.02 81.48,13.02 81.48,14.61 J1.13 | v52.58,30.96 52.43,31.11 51.79,31.11 R7.1 | v52.58,35.56 51.95,36.2 D10.2 | v80.05,10.79 112.27,10.79 120.85,2.22 SCK.TP
  Bottom 0.004: v13.37,83.82 13.37,57.31 v20.2,50.48 | v80.05,10.79 79.73,10.48 75.13,10.48 v75.13,13.49 57.66,30.96 v52.58,30.96 v52.58,35.56 52.58,39.85 v41.63,50.8
SCL  (via drill 0.3)
  Top 0.004: 151.17,13.81 151.17,7.14 151.33,6.99 151.49,6.99 151.96,6.51 R2_PINH.1 | 153.87,13.81 151.17,13.81 | 153.87,13.81 155.14,12.54 SENSOR2.4 | 153.87,13.81 164.98,13.81 164.98,19.84 164.82,20 164.66,20 164.19,20.48 J3.4 | 133.07,40.16 132.75,39.85 131.8,39.85 U4.7 | 133.07,40.16 133.07,49.53 93.7,49.53 U3.16 93.54,49.69 93.07,49.69 v93.07,50.8 | v84.02,59.37 17.98,59.37 17.98,61.12 U2.20 | v151.17,17.78 151.17,13.81 | 133.07,40.16 v133.23,40.01
  Bottom 0.004: v84.02,59.37 89.57,53.82 91.32,53.82 91.32,51.28 92.11,50.48 93.07,50.48 v93.07,50.8 | v151.17,17.78 133.23,35.72 v133.23,40.01
SDA  (via drill 0.3)
  Top 0.004: 157.2,11.75 157.2,5.71 157.04,5.56 153.55,5.56 153.55,6.35 R1_PINH.1 | 157.2,11.75 154.82,11.75 154.66,11.91 | 154.66,11.91 154.18,12.38 SENSOR2.3 | 157.2,11.75 165.14,11.75 165.14,20.8 164.82,21.11 163.23,21.11 163.23,20.16 163.39,20 163.71,20 164.03,19.68 J3.3 | v92.27,60.64 84.65,60.64 83.54,59.53 19.25,59.53 19.25,61.12 U2.19 | v92.27,50.96 92.27,49.69 U3.15 92.43,49.53 92.43,49.21 93.38,48.26 123.7,48.26 131.64,40.32 U4.8 131.8,40.32 v132.59,40.32 | 154.66,11.91 154.34,11.59 v154.18,11.59
  Bottom 0.004: v92.27,50.96 v92.27,60.64 | v154.18,11.59 132.59,33.18 v132.59,40.32
SRC
  Top 0.004: 79.1,31.75 81.64,31.75 81.64,36.83 D3.2 | C4.1 76.4,26.19 77.51,26.19 C4.2 | Q3.3 63.7,19.68 68.71,24.7 68.71,28.53 69.23,29.05 74.81,29.05 77.51,26.35 C4.2 | 86.72,27.15 85.92,26.35 79.1,26.35 | 86.72,27.15 87.19,27.62 D4.1 | 79.1,26.35 77.67,26.35 C4.2 | 86.72,27.15 91.64,27.15 91.64,28.1 91.48,28.26 90.84,28.26 90.84,31.27 D5.2 | 79.1,26.35 79.1,31.75 | 79.1,31.75 L1.1
SS_SD  (via drill 0.3)
  Top 0.004: D6.2 9.4,97.95 8.77,98.58 5.75,98.58 5.44,98.27 R10.1 5.28,98.27 4.32,99.22 4.32,100.01 3.21,100.01 1.78,98.58 1.78,87.79 6.55,87.79 | v11.47,42.55 11.47,43.66 U2.4 | 6.55,87.79 6.39,87.95 J4.P2 6.55,87.79 | 6.55,87.79 v7.18,87.15
  Bottom 0.004: v11.47,42.55 7.18,46.83 v7.18,87.15
TX
  Top 0.004: U2.25 11.47,61.28 11.47,64.93 10.2,64.93 TX.TP
USB_D+  (via drill 0.3)
  Top 0.004: v59.09,53.18 143.87,53.18 148.47,48.58 D1.1 | v50.04,44.13 49.73,44.45 35.44,44.45 35.12,44.13 24.64,44.13 24.33,43.81 U2.14
  Bottom 0.004: v50.04,44.13 v59.09,53.18
USB_D-
  Top 0.004: D1.3 148.47,46.51 147.99,46.04 136.88,46.04 129.9,53.02 99.73,53.02 98.3,51.59 86.56,51.59 85.29,50.32 85.29,46.99 23.53,46.99 20.99,44.45 20.99,42.86 22.26,42.86 23.06,43.66 U2.13
VBAT  (via drill 0.3)
  Top 0.008: U4.2 129.74,39.69 129.74,39.37 U4.3 129.74,39.21 124.66,39.21 121.8,36.35 | 121.8,36.35 121.8,35.72 121.48,35.4 119.74,35.4 119.74,33.5 120.05,33.18 133.07,33.18 Q1.3 | 121.8,36.35 118.78,36.35 118.47,36.04 U1.3 118.31,35.88 117.83,35.4 115.61,35.4 115.13,35.88 C2_BAT.1 114.97,35.88 v83.7,35.88 | v78.14,30.32 15.28,30.32 14.8,30.8 VBAT.TP
  Bottom 0.008: v83.7,35.88 v78.14,30.32
VBUS  (via drill 0.3)
  Top 0.008: v116.4,36.83 116.4,38.1 CHG_LED.A | 118.47,34.45 118.94,33.97 C1_BAT.1 119.1,33.81 119.89,33.02 130.21,33.02 132.44,30.8 Q1.1 132.59,30.8 141.17,39.37 144.02,39.37 147.99,43.34 149.58,43.34 C5_USB.1 | v117.67,20.8 117.67,19.05 R1_PWRBUS.2 | v118.94,23.34 118.62,23.34 118.15,23.81 D2.2 | 118.47,34.45 119.58,35.56 120.53,35.56 120.85,35.88 U1.4 | 118.47,34.45 v118.31,34.61 | C5_USB.1 149.74,43.5 149.74,44.61 C4_USB.1 149.74,44.77 150.06,44.77 v150.06,45.56 | v150.06,46.99 150.53,46.99 151.01,47.47 D1.5 | v143.39,53.66 131.8,65.25 VBUS.TP | PFMF.050.1.2 151.8,39.85 151.8,42.7 150.37,42.7 149.74,43.34 C5_USB.1
  Bottom 0.008: v116.4,36.83 118.31,34.92 v118.31,34.61 118.31,23.34 | v117.67,20.8 118.31,21.43 118.31,23.34 | 118.31,23.34 v118.94,23.34 | v150.06,45.56 v150.06,46.99 v143.39,53.66
VRTC  (via drill 0.3)
  Top 0.008: 91.16,48.26 91.16,49.53 U3.14 | 91.16,48.26 91.16,45.72 C11.1 | v93.07,61.28 92.59,61.28 92.59,62.07 R_CAPACITOR.2 | v99.89,54.45 101.96,54.45 C10_SUPERCAP.2 | v91.8,48.26 91.16,48.26
  Bottom 0.008: v99.89,54.45 98.94,55.4 | 98.94,55.4 v93.07,61.28 | 98.94,55.4 v91.8,48.26
VUSB  (via drill 0.3)
  Top 0.008: J2.A4 163.23,51.91 163.23,52.07 J2.B9 163.39,52.23 v164.66,52.23 | J2.A9 163.23,56.83 163.23,56.67 J2.B4 163.39,56.52 163.87,56.52 v164.34,56.04 | v150.69,38.89 149.9,39.69 147.52,39.69 PFMF.050.1.1
  Bottom 0.008: 164.34,52.55 v164.66,52.23 | v164.34,56.04 164.34,52.55 | v150.69,38.89 164.34,52.55